# EAGLE board BLDC Motor (EAGLE 7.3.0)
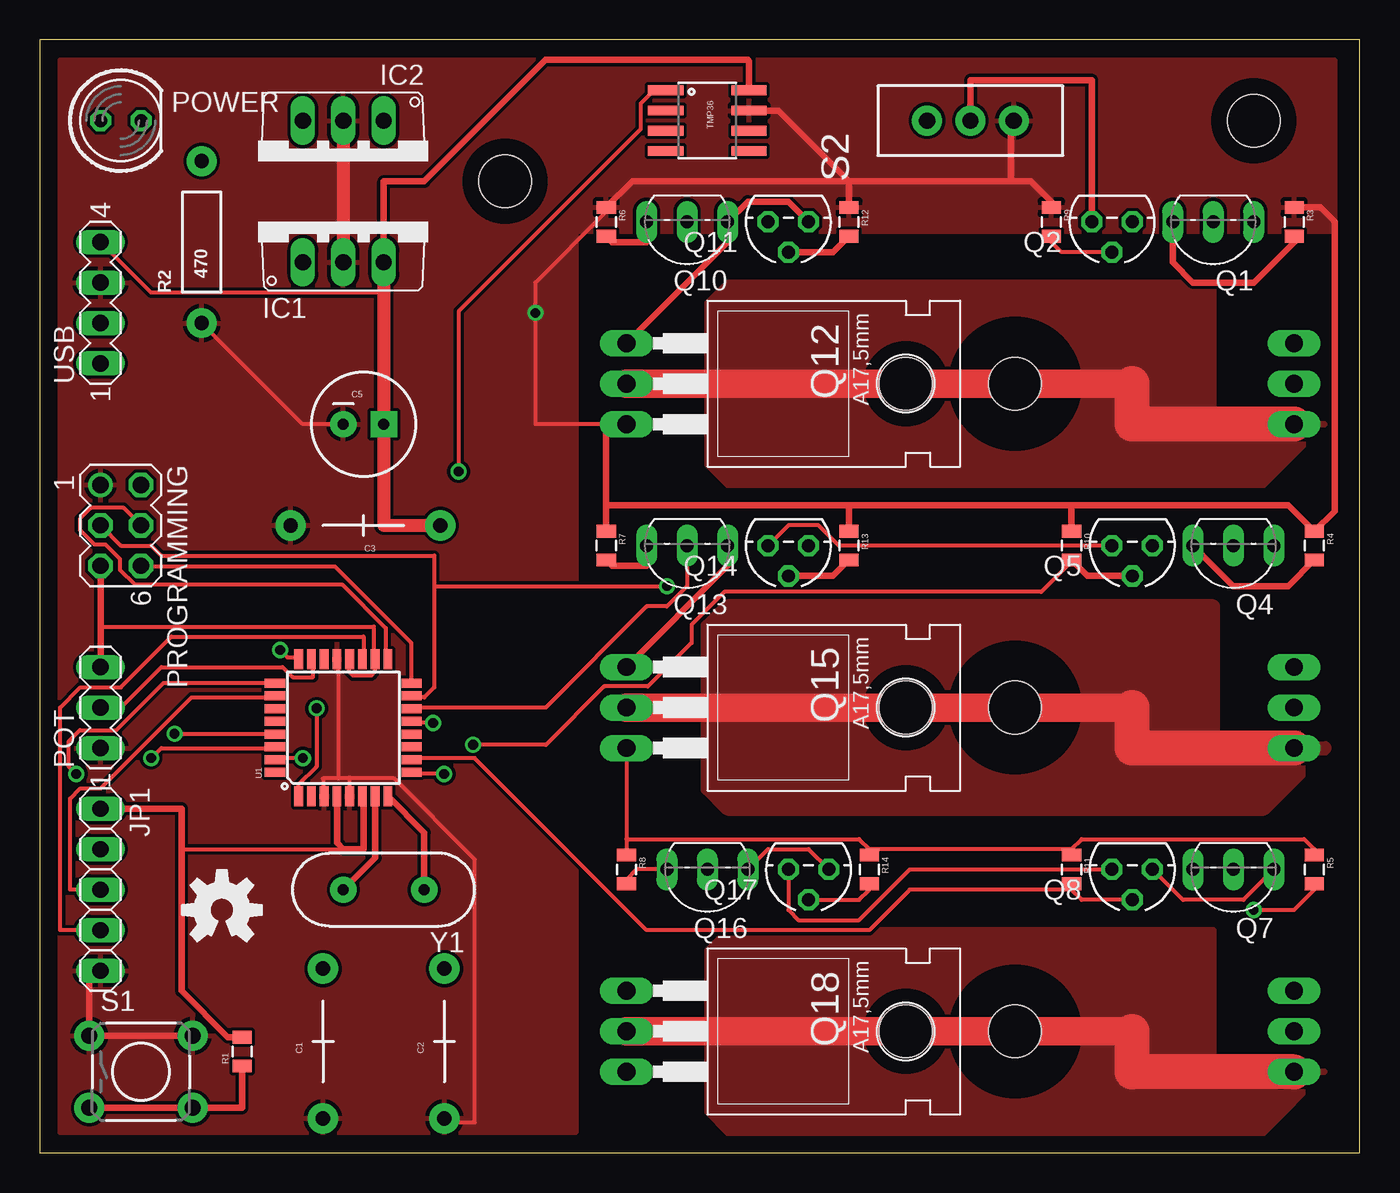
[diagram p0: board, top side]
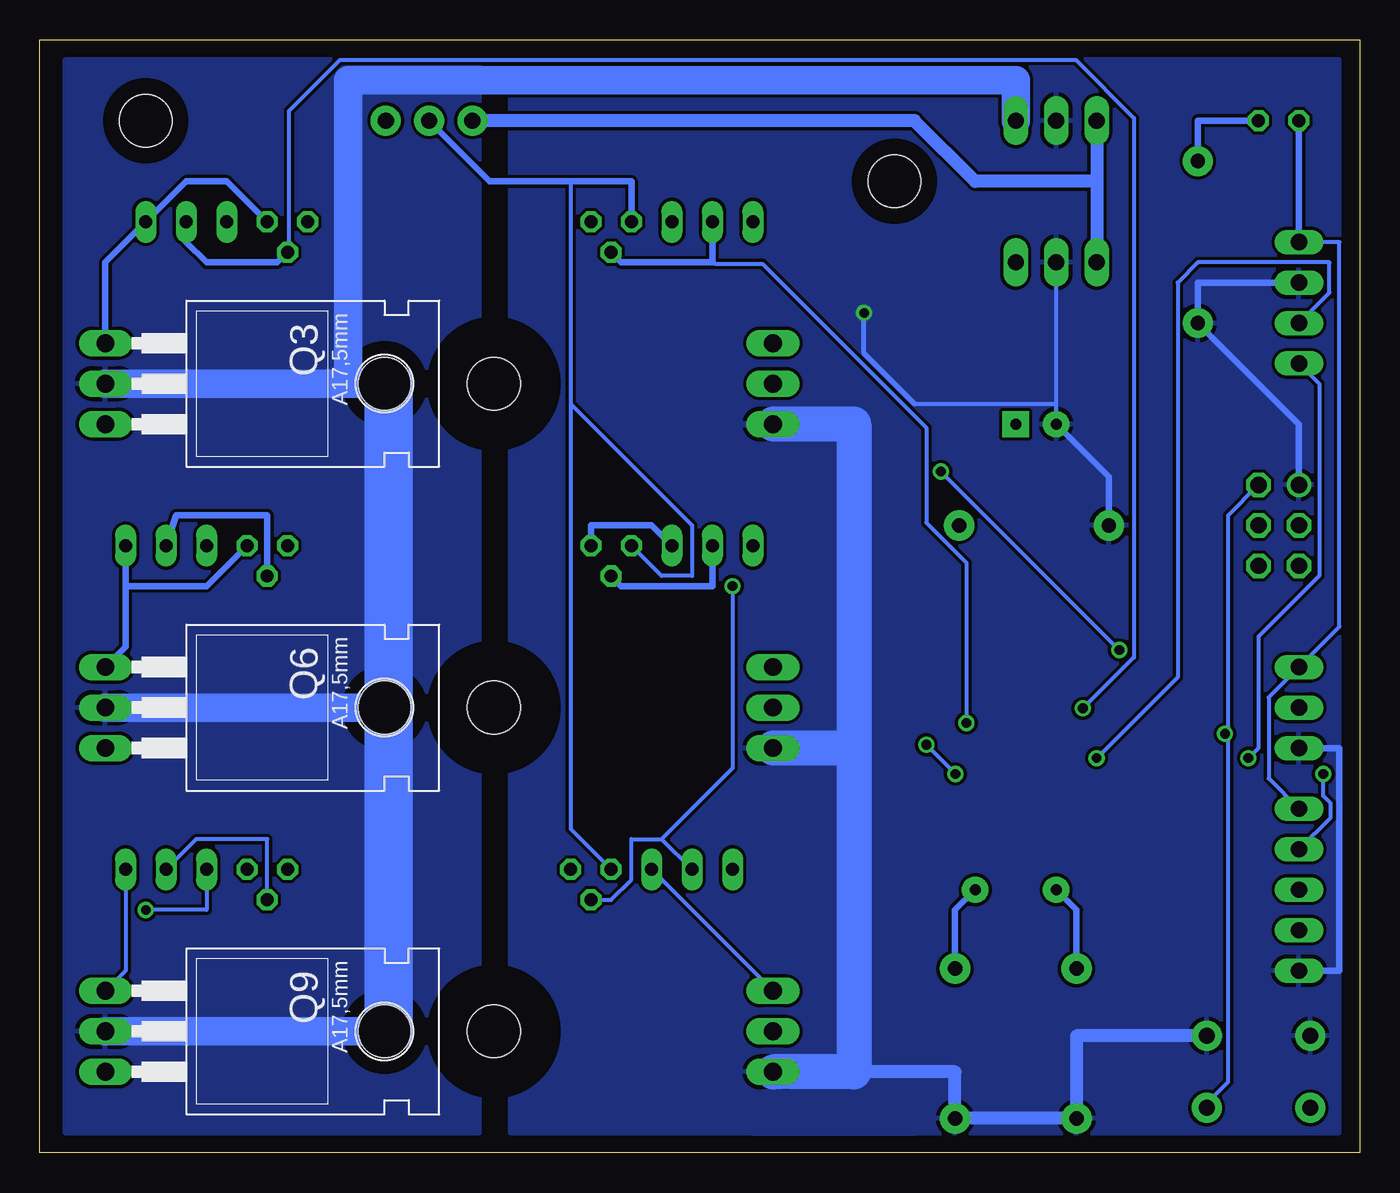
[diagram p1: board, bottom side, seen from below]

Size 82.86 x 69.84 mm. Coordinates in mm from the lower left corner, seen from the top.
Outline: 0,0 82.86,0 82.86,69.84 0,69.84 0,0
Copper layers (1*16): Top 0.035mm / dielectric 1.5mm / Bottom 0.035mm
Design rules "default": minimum track width 10mil, minimum drill 24mil, track to track 8mil, track to pad 8mil, pad to pad 8mil, via to via 8mil, smd to smd 8mil, copper to edge 40mil, drill to drill 8mil, minimum pad ring 10mil, minimum via ring 8mil, stop-mask expansion 4mil, vias tented up to drill 0mil, thermal gap 10mil
Net classes: 0 default: width 0.254 mm, drill 0.381 mm, clearance 0.203 mm

## Footprints (pad centres in the part's own frame; a part is rotated, then mirrored left to right if it is on the bottom)
CAP-PTH-LARGE = drill 0.9 pad 1.905: 1 -4.826,0; 2 4.572,0
CPOL-RADIAL-100UF-25V = drill 0.7 pad 1.651 square: 1 1.27,0 | drill 0.7 pad 1.651: 2 -1.27,0
TO220V = drill 1.016 long: 1 -2.54,-2.54; 2 0,-2.54; 3 2.54,-2.54
1X05 = drill 1.016 long: 1 -5.08,0; 2 -2.54,0; 3 0,0; 4 2.54,0; 5 5.08,0
STAND-OFF = hole 3.302: 0,0
MA03-1 = drill 1.016 long: 1 -2.54,0; 2 0,0; 3 2.54,0
LED5MM = drill 0.813 octagon: A -1.27,0; K 1.27,0
MA03-2 = drill 1.016: 1 -2.54,-1.27 | drill 1.016 octagon: 2 -2.54,1.27; 3 0,-1.27; 4 0,1.27; 5 2.54,-1.27; 6 2.54,1.27
TO92-OVAL = drill 0.813 long: 1 -2.54,0; 2 0,0; 3 2.54,0
TO-92 = drill 0.813 octagon: 1 -1.27,0; 2 0,1.905; 3 1.27,0
TO220 = drill 1.118 long: 1 -2.54,-6.35; 2 0,-6.35; 3 2.54,-6.35 | hole 3.302: 0,11.176
0805 = smd 0.8 x 1.2: 1 -0.9,0; 2 0.9,0
AXIAL-0.4 = drill 0.9 pad 1.88: P$1 -5.08,0; P$2 5.08,0
TACTILE-PTH = drill 1.016 pad 1.88: 1 -3.251,2.261; 2 3.251,2.261; 3 -3.251,-2.261; 4 3.251,-2.261
SWITCH-SPDT_LOCK.007S = drill 1.016 pad 1.88: 1 0,2.718; 2 0,0; 3 0,-2.718
SOIC8 = smd 0.61 x 2.21: 1 -1.905,-2.616; 2 -0.635,-2.616; 3 0.635,-2.616; 4 1.905,-2.616; 5 1.905,2.616; 6 0.635,2.616; 7 -0.635,2.616; 8 -1.905,2.616
TQFP32-08 = smd 1.27 x 0.559: 1 -4.293,2.8; 2 -4.293,2; 3 -4.293,1.2; 4 -4.293,0.4; 5 -4.293,-0.4; 6 -4.293,-1.2; 7 -4.293,-2; 8 -4.293,-2.8; 17 4.293,-2.8; 18 4.293,-2; 19 4.293,-1.2; 20 4.293,-0.4; 21 4.293,0.4; 22 4.293,1.2; 23 4.293,2; 24 4.293,2.8 | smd 0.559 x 1.27: 9 -2.8,-4.293; 10 -2,-4.293; 11 -1.2,-4.293; 12 -0.4,-4.293; 13 0.4,-4.293; 14 1.2,-4.293; 15 2,-4.293; 16 2.8,-4.293; 25 2.8,4.293; 26 2,4.293; 27 1.2,4.293; 28 0.4,4.293; 29 -0.4,4.293; 30 -1.2,4.293; 31 -2,4.293; 32 -2.8,4.293
MA04-1 = drill 1.016 long: 1 -3.81,0; 2 -1.27,0; 3 1.27,0; 4 3.81,0
HC49US = drill 0.7 pad 1.651: 1 -2.54,0; 2 2.54,0

## Placement (x,y rotation side)
C1  22pF  [CAP-PTH-LARGE]  17.78,6.99 90 top
C2  22pF  [CAP-PTH-LARGE]  25.4,6.99 90 top
C3  0.1u  [CAP-PTH-LARGE]  20.32,39.37 180 top
C5  100u  [CPOL-RADIAL-100UF-25V]  20.32,45.72 0 top
IC1  7805TV  [TO220V]  19.05,58.42 0 top
IC2  7815TV  [TO220V]  19.05,62.23 180 top
JP1  [1X05]  3.81,16.51 270 top
JP2  STAND-OFF  [STAND-OFF]  76.2,64.77 0 top
JP4  STAND-OFF  [STAND-OFF]  29.21,60.96 0 top
POT  [MA03-1]  3.81,27.94 90 top
POWER  [LED5MM]  5.08,64.77 0 top
PROGRAMMING  [MA03-2]  5.08,39.37 270 top
Q1  TP2104  [TO92-OVAL]  73.66,58.42 180 top
Q2  [TO-92]  67.31,58.42 180 top
Q3  IRFB4115  [TO220]  72.39,48.26 270 bottom
Q4  TP2104  [TO92-OVAL]  74.93,38.1 180 top
Q5  [TO-92]  68.58,38.1 180 top
Q6  IRFB4115  [TO220]  72.39,27.94 270 bottom
Q7  TP2104  [TO92-OVAL]  74.93,17.78 180 top
Q8  [TO-92]  68.58,17.78 180 top
Q9  IRFB4115  [TO220]  72.39,7.62 270 bottom
Q10  TP2104  [TO92-OVAL]  40.64,58.42 180 top
Q11  [TO-92]  46.99,58.42 180 top
Q12  IRFB4115  [TO220]  43.18,48.26 270 top
Q13  TP2104  [TO92-OVAL]  40.64,38.1 180 top
Q14  [TO-92]  46.99,38.1 180 top
Q15  IRFB4115  [TO220]  43.18,27.94 270 top
Q16  TP2104  [TO92-OVAL]  41.91,17.78 180 top
Q17  [TO-92]  48.26,17.78 180 top
Q18  IRFB4115  [TO220]  43.18,7.62 270 top
R1  10k  [0805]  12.7,6.35 90 top
R2  470  [AXIAL-0.4]  10.16,57.15 90 top
R3  10k  [0805]  78.74,58.42 270 top
R4  10k  [0805]  80.01,38.1 270 top
R5  10k  [0805]  80.01,17.78 270 top
R6  10k  [0805]  35.56,58.42 270 top
R7  10k  [0805]  35.56,38.1 270 top
R8  10k  [0805]  36.83,17.78 270 top
R9  10k  [0805]  63.5,58.42 270 top
R10  10k  [0805]  64.77,38.1 270 top
R11  10k  [0805]  64.77,17.78 270 top
R12  10k  [0805]  50.8,58.42 270 top
R13  10k  [0805]  50.8,38.1 270 top
R14  10k  [0805]  52.07,17.78 270 top
S1  [TACTILE-PTH]  6.35,5.08 0 top
S2  [SWITCH-SPDT_LOCK.007S]  58.42,64.77 90 top
TMP36  [SOIC8]  41.91,64.77 270 top
U1  ATMEGA328P_TQFP  [TQFP32-08]  19.05,26.67 90 top
U$1  OSHW-LOGOM  [OSHW-LOGO-M]  11.43,15.24 0 top
USB  [MA04-1]  3.81,53.34 90 top
Y1  16M  [HC49US]  21.59,16.51 180 top

## Library data of the parts
C1-C3 C5 JP2 JP4 R1-R14 S1 S2 TMP36 U$1 Y1 = SparkFun
IC1 IC2 = linear
JP1 = pinhead
POT PROGRAMMING USB = con-lstb; OC_FARNELL: unknown; OC_NEWARK: unknown
POWER = led
Q1 Q4 Q7 Q10 Q13 Q16 = adafruit
Q2 Q5 Q8 Q11 Q14 Q17 = transistors
Q3 Q6 Q9 Q12 Q15 Q18 = transistor-fet
U1 = SparkFun-DigitalIC; PROD_ID: IC-09069

## Nets
15V: IC1.1 IC2.3 S2.1
BATTPOS: IC2.1 Q3.2 Q6.2 Q9.2
GND: C1.1 C2.1 C3.2 C5.2 IC1.2 IC2.2 JP1.5 POT.1 PROGRAMMING.1 Q12.3 Q15.3 Q18.3 R2.P$1 R3.1 R4.1 R5.1 R6.1 R7.1 R8.1 R9.1 R10.1 R11.1 R12.1 R13.1 R14.1 S1.1 S1.2 S2.3 TMP36.7 U1.3 U1.5 U1.21 USB.3
HALL_A: JP1.2 U1.25
HALL_B: JP1.3 U1.26
HALL_C: JP1.4 U1.19
MISO: PROGRAMMING.6 U1.16
MOSI: PROGRAMMING.3 Q16.2 Q17.2 R14.2 U1.15
N$1: C2.2 U1.8 Y1.1
N$2: C1.2 U1.7 Y1.2
N$3: POWER.K R2.P$2
N$4: Q1.3 R3.2
N$5: Q1.1 Q2.1 Q3.1
N$6: TMP36.1 U1.24
N$9: Q2.3 Q5.3 Q8.3 Q11.3 Q14.3 Q17.3 S2.2
N$10: Q4.3 R4.2
N$12: U1.22
N$13: Q4.1 Q5.1 Q6.1
N$14: Q7.3 R5.2
N$15: U1.32
N$16: Q7.1 Q8.1 Q9.1
N$17: U1.2
N$18: Q10.3 R6.2
N$19: Q10.1 Q11.1 Q12.1
N$20: U1.11
N$21: U1.12
N$22: Q13.3 R7.2
N$23: Q13.1 Q14.1 Q15.1
N$24: Q16.3 R8.2
N$25: Q16.1 Q17.1 Q18.1
PHASEA: Q3.3 Q12.2
PHASEB: Q6.3 Q15.2
PHASEC: Q9.3 Q18.2
PULSE1: Q1.2 Q2.2 R9.2 U1.1
PULSE2: Q4.2 Q5.2 R10.2 U1.9
PULSE3: Q7.2 Q8.2 R11.2 U1.10
PULSE4: Q10.2 Q11.2 R12.2 U1.13
PULSE5: Q13.2 Q14.2 R13.2 U1.14
RST: PROGRAMMING.2 R1.1 S1.3 S1.4 U1.29
RX: U1.30 USB.1
SCK: PROGRAMMING.4 U1.17
SCL: U1.28
SDA: U1.27
THROTTLE: POT.2 U1.23
TX: U1.31 USB.2
VCC: C3.1 C5.1 IC1.3 JP1.1 POT.3 POWER.A PROGRAMMING.5 R1.2 TMP36.8 U1.4 U1.6 U1.18 U1.20 USB.4

## Tracks (layer width: path | path; a pad name or v marks a point on that pad's centre or on a via)
15V
  Bottom 0.813: 16.51,60.96 IC1.1 | IC2.3 16.51,60.96 | 16.51,60.96 24.13,60.96 27.94,64.77 S2.1
BATTPOS
  Bottom 1.778: Q9.2 60.96,7.62 | Q6.2 60.96,27.94 | Q3.2 63.5,48.26 | 63.5,48.26 60.96,48.26 | IC2.1 21.59,67.31 63.5,67.31 63.5,48.26
  Bottom 3.048: 60.96,7.62 60.96,27.94 60.96,48.26
  pour Bottom: 55.88,2.54 73.66,2.54 73.66,6.99 80.01,6.99 80.01,8.26 73.66,8.26 73.66,12.7 64.77,12.7 64.77,22.86 73.66,22.86 73.66,27.3 80.01,27.3 80.01,28.57 73.66,28.57 73.66,33.02 64.77,33.02 64.77,43.18 73.66,43.18 73.66,47.62 80.01,47.62 80.01,48.9 73.66,48.9 73.66,53.34 55.88,53.34
  pour Bottom: 81.28,68.58 81.28,1.27 55.24,1.27 55.24,68.58
GND  (via drill 0.6)
  Top 0.254: 64.77,19.05 52.07,19.05 | 64.77,19.05 65.41,19.68 79.38,19.68 80.01,19.05 R5.1 | 64.77,19.05 R11.1 | Q15.3 36.83,19.68 | 36.83,19.68 R8.1 | 19.43,23.5 22.23,23.5 27.3,18.41 27.3,1.91 25.4,1.91 C2.1 | 19.43,23.5 18.75,23.5 | 18.75,23.5 17.78,23.5 17.78,22.86 U1.3 | R2.P$1 16.51,45.72 C5.2 | 52.07,19.05 51.44,19.68 36.83,19.68 | 52.07,19.05 R14.1 | 35.56,45.72 31.11,45.72 v31.11,52.7 31.11,54.61 35.56,59.05 R6.1 | 19.43,23.5 19.43,22.4 U1.5 | 19.43,23.55 19.43,23.5 | 18.75,23.5 18.75,30.86 U1.21
  Top 0.406: Q12.3 35.56,45.72 35.56,40.64 | S1.2 S1.1 3.1,10.72 JP1.5 | R7.1 35.56,40.64 | 35.56,40.64 50.8,40.64 | R13.1 50.8,40.64 | 50.8,40.64 64.77,40.64 | 64.77,40.64 R10.1 | TMP36.7 46.35,65.41 50.8,60.96 | 50.8,60.96 R12.1 | R6.1 37.2,60.96 50.8,60.96 | 50.8,60.96 60.96,60.96 | 60.96,60.96 62.23,60.96 63.5,59.69 R9.1 | S2.3 60.96,64.59 60.96,60.96 | 64.77,40.64 78.37,40.64 R4.1 81.28,40.27 81.28,58.42 80.38,59.32 R3.1
  Top 0.813: IC2.2 IC1.2
  Bottom 0.254: C5.2 19.05,46.99 | 19.05,46.99 IC1.2 | 27.94,46.99 19.05,46.99
  Bottom 0.305: 27.94,46.99 31.11,50.16 v31.11,52.7
  Bottom 0.406: USB.3 10.16,54.61 R2.P$1 3.81,45.72 PROGRAMMING.1 | POT.1 1.27,25.4 1.27,11.43 JP1.5 | C3.2 15.75,42.42 C5.2
  Bottom 0.813: 31.75,5.08 25.4,5.08 C2.1 C1.1 17.78,7.34 S1.2
  Bottom 2.184: 31.75,25.4 31.75,45.72 Q12.3 | 31.75,25.4 Q15.3 | 31.75,25.4 31.75,5.08 Q18.3
  pour Bottom: 36.83,43.81 39.37,46.35 39.37,46.99 27.94,46.99 27.94,2.54 27.94,1.27 38.1,1.27 38.1,6.35 34.29,6.35 34.29,41.27
  pour Bottom: 1.27,1.27 1.27,68.58 53.34,68.58 53.34,1.27 1.91,1.27
  pour Top: 1.27,68.58 81.28,68.58 81.28,57.78 33.66,57.78 33.66,1.27 1.27,1.27
HALL_A  (via drill 0.61)
  Top 0.254: v2.29,23.77 1.83,24.23 1.83,25.83 2.52,26.52 4.8,26.52 7.77,29.49 14.63,29.49 U1.25
  Bottom 0.254: v2.29,23.77 2.29,22.4 1.83,21.95 1.83,21.03 JP1.2
HALL_B
  Top 0.254: JP1.3 1.91,16.51 1.91,22.23 2.54,22.86 3.81,22.86 9.53,28.57 14.61,28.57 U1.26
HALL_C
  Top 0.254: JP1.4 1.27,13.97 1.27,27.94 2.54,29.21 5.08,29.21 8.26,32.38 20.32,32.38 20.32,31.11 U1.19
MISO
  Top 0.254: U1.16 23.32,29.49 23.32,32 18.52,36.8 6.4,36.8 PROGRAMMING.6
MOSI  (via drill 0.61)
  Top 0.254: Q17.2 51.44,15.88 52.07,16.51 R14.2 | 24.77,35.56 24.77,37.47 7.62,37.47 6.99,38.1 5.08,38.1 PROGRAMMING.3 | 24.77,35.56 24.77,29.21 24.13,28.57 23.5,28.57 U1.15 | 24.77,35.56 v39.37,35.56
  Bottom 0.254: 43.81,19.68 Q16.2 | 43.81,19.68 45.72,19.68 45.72,17.14 46.99,15.88 Q17.2 | 43.81,19.68 39.37,24.13 v39.37,35.56
N$1
  Top 0.406: Y1.1 24.13,20.1 U1.8
  Bottom 0.406: C2.2 25.4,15.24 Y1.1
N$2
  Top 0.406: Y1.2 21.05,18.51 U1.7
  Bottom 0.406: C1.2 17.78,15.24 Y1.2
N$3
  Bottom 0.406: POWER.K 10.16,64.77 R2.P$2
N$4
  Top 0.406: R3.2 78.74,57.15 76.2,54.61 72.39,54.61 71.12,55.88 Q1.3
N$5
  Bottom 0.406: Q3.1 78.74,55.88 Q1.1 73.66,60.96 71.12,60.96 Q2.1
N$6  (via drill 0.61)
  Top 0.254: v15.09,31.55 15.54,31.09 16.23,31.09 U1.24 | v26.29,42.75 26.29,52.81 37.72,64.24 37.72,65.84 38.41,66.52 39.09,66.52 TMP36.1
  Bottom 0.254: v26.29,42.75 v15.09,31.55
N$9
  Top 0.254: Q14.3 46.99,39.37 48.9,39.37 50.16,38.1 Q5.3 | Q8.3 54.61,17.78 51.44,14.61 47.62,14.61 46.99,15.24 Q17.3
  Top 0.406: Q2.3 66.04,67.31 58.42,67.31 S2.2
  Bottom 0.254: Q17.3 49.53,20.32 49.53,46.99 | 49.53,60.96 49.53,46.99 | Q14.3 43.81,36.2 41.91,36.2 41.91,39.37 49.53,46.99
  Bottom 0.406: S2.2 54.61,60.96 49.53,60.96 45.72,60.96 Q11.3
N$10
  Top 0.406: R4.2 78.37,35.56 74.93,35.56 Q4.3
N$13
  Bottom 0.406: Q6.1 77.47,31.75 77.47,35.56 | 77.47,35.56 Q4.1 | Q5.1 72.39,35.56 77.47,35.56
N$14  (via drill 0.61)
  Top 0.254: v76.2,15.24 78.74,15.24 80.01,16.51 R5.2
  Bottom 0.254: v76.2,15.24 72.39,15.24 Q7.3
N$16
  Top 0.254: Q8.1 71.75,15.88 75.56,15.88 Q7.1
  Bottom 0.254: Q9.1 77.47,11.43 Q7.1
N$18
  Top 0.406: R6.2 35.93,57.15 38.1,57.15 Q10.3
N$19
  Top 0.406: Q12.1 43.18,57.15 Q10.1 44.45,59.69 46.99,59.69 Q11.1
N$22
  Top 0.406: R7.2 35.93,36.83 38.1,36.83 Q13.3
N$23
  Top 0.406: Q15.1 43.18,36.83 Q13.1
  Bottom 0.406: Q13.1 44.45,39.37 48.26,39.37 Q14.1
N$24
  Top 0.254: Q16.3 37.47,17.78 36.83,17.14 R8.2
N$25
  Top 0.254: Q17.1 48.26,19.05 45.72,19.05 Q16.1
  Bottom 0.254: Q18.1 Q16.1
PHASEA
  Top 1.778: 68.58,48.26 Q12.2
  Top 2.184: Q3.3 68.58,45.72 68.58,48.26
  pour Top: 41.91,43.18 43.18,41.91 76.83,41.91 80.64,45.72 80.01,46.35 73.66,46.35 73.66,54.61 43.18,54.61 41.91,53.34
PHASEB
  Top 1.778: 68.58,27.94 Q15.2
  Top 2.184: Q6.3 68.58,25.4 68.58,27.94
  pour Top: 41.91,22.86 43.18,21.59 76.83,21.59 80.64,25.4 80.01,26.04 73.66,26.04 73.66,34.29 43.18,34.29 41.91,33.02
PHASEC
  Top 1.778: 68.58,7.62 Q18.2
  Top 2.184: Q9.3 68.58,5.08 68.58,7.62
  pour Top: 41.91,2.54 43.18,1.27 76.83,1.27 80.64,5.08 80.01,5.71 73.66,5.71 73.66,13.97 43.18,13.97 41.91,12.7
  pour Top: 41.91,22.86 43.18,21.59 76.83,21.59 80.64,25.4 80.01,26.04 73.66,26.04 73.66,34.29 43.18,34.29 41.91,33.02
PULSE1  (via drill 0.61)
  Top 0.254: Q2.2 64.14,56.52 63.5,57.15 R9.2 | v17.37,27.89 17.37,24.23 16.23,23.09 16.23,22.4 U1.1
  Bottom 0.254: v17.37,27.89 14.17,31.09 14.17,64.92 17.83,68.58 64.01,68.58 67.21,65.38 67.21,56.69 Q2.2
  Bottom 0.406: Q1.2 73.66,57.15 72.39,55.88 67.94,55.88 Q2.2
PULSE2  (via drill 0.61)
  Top 0.254: v25.38,23.77 23.55,23.77 U1.9 | v27.2,25.6 31.77,25.6 35.43,29.26 38.18,29.26 40.92,32 40.92,33.15 42.98,35.2 62.87,35.2 64.69,37.03 R10.2
  Top 0.406: R10.2 65.78,36.2 Q5.2
  Bottom 0.254: v27.2,25.6 v25.38,23.77
  Bottom 0.406: Q4.2 74.3,40.01 68.58,40.01 Q5.2
PULSE3
  Top 0.254: 64.77,16.51 65.41,15.88 Q8.2 | 64.77,16.51 54.61,16.51 52.07,13.97 38.1,13.97 27.3,24.77 23.5,24.77 U1.10 | 64.77,16.51 R11.2
  Bottom 0.254: Q7.2 73.03,19.68 68.58,19.68 Q8.2
PULSE4  (via drill 0.61)
  Top 0.254: v24.69,26.98 23.55,26.98 U1.13
  Top 0.406: R12.2 49.8,56.52 Q11.2
  Bottom 0.254: v24.69,26.98 24.69,37.03 27.2,39.55 27.2,45.49 37.49,55.78 40.46,55.78 40.64,55.88
  Bottom 0.406: Q11.2 46.35,55.88 40.64,55.88 Q10.2
PULSE5
  Top 0.254: Q13.2 40.64,35.56 39.37,34.29 38.1,34.29 31.75,27.94 23.5,27.94 U1.14
  Top 0.406: R13.2 49.8,36.2 Q14.2
  Bottom 0.406: Q14.2 46.35,35.56 40.64,35.56 Q13.2
RST  (via drill 0.61)
  Top 0.254: v8.46,26.29 14.63,26.29 U1.29
  Top 0.406: R1.1 12.7,2.82 S1.4 S1.3
  Bottom 0.254: PROGRAMMING.2 8.26,40.01 8.26,26.29 | 8.26,26.29 8.26,4.45 9.53,3.17 S1.4 | 8.26,26.29 v8.46,26.29 | 8.23,26.29 8.26,26.29
RX  (via drill 0.61)
  Top 0.254: v6.99,24.77 7.62,25.4 14.61,25.4 U1.30
  Bottom 0.254: v6.99,24.77 6.35,25.4 6.35,32.38 2.54,36.2 2.54,48.26 USB.1
SCK
  Top 0.254: PROGRAMMING.4 5.26,40.46 3.2,40.46 2.52,39.78 2.52,39.09 3.43,38.18 4.12,38.18 5.03,37.26 5.03,36.58 5.94,35.66 18.97,35.66 21.72,32.92 21.72,31.09 U1.17
THROTTLE
  Top 0.254: POT.2 5.08,27.94 7.62,30.48 15.24,30.48 15.88,29.84 17.14,29.84 17.14,30.48 U1.23
TX  (via drill 0.61)
  Top 0.254: v16.51,24.77 15.24,24.77 U1.31
  Bottom 0.254: v16.51,24.77 11.43,29.84 11.43,54.61 10.16,55.88 1.91,55.88 1.91,53.98 USB.2
VCC
  Top 0.254: USB.4 6.99,53.98 21.59,53.98 | 8.89,19.05 19.05,19.05 | 3.81,33.02 20.95,33.02 20.95,31.11 U1.18 21.03,30.86 21.03,30.18 20.8,29.95 19.66,29.95 19.43,30.18 19.43,30.86 U1.20
  Top 0.406: R1.2 11.8,7.25 8.89,10.16 8.89,19.05 8.89,21.59 JP1.1 | POT.3 3.81,33.02 PROGRAMMING.5 | IC1.3 21.59,60.96 24.13,60.96 31.75,68.58 44.45,68.58 44.53,68.5 TMP36.8 | U1.6 20.32,22.31 20.32,19.05 19.05,19.05 18.65,19.45 U1.4
  Top 0.813: IC1.3 21.59,53.98 C5.1 21.59,39.37 C3.1
  Bottom 0.254: JP1.1 5.71,23.5 5.71,28.57 POT.3 1.27,33.02 1.27,57.15 USB.4
  Bottom 0.406: POWER.A USB.4